# Altium PCB WhetherTime.PcbDoc
Units mil, origin at the board's own origin, x right, y up, seen from the top; angles counter-clockwise.
Board outline 1120 x 1125 mil, 4 copper layers (Top Layer, GND02, PWR03, Bottom Layer), stack 23.756 mil thick; 22 components, 11 nets, 78 pads, 18 vias.
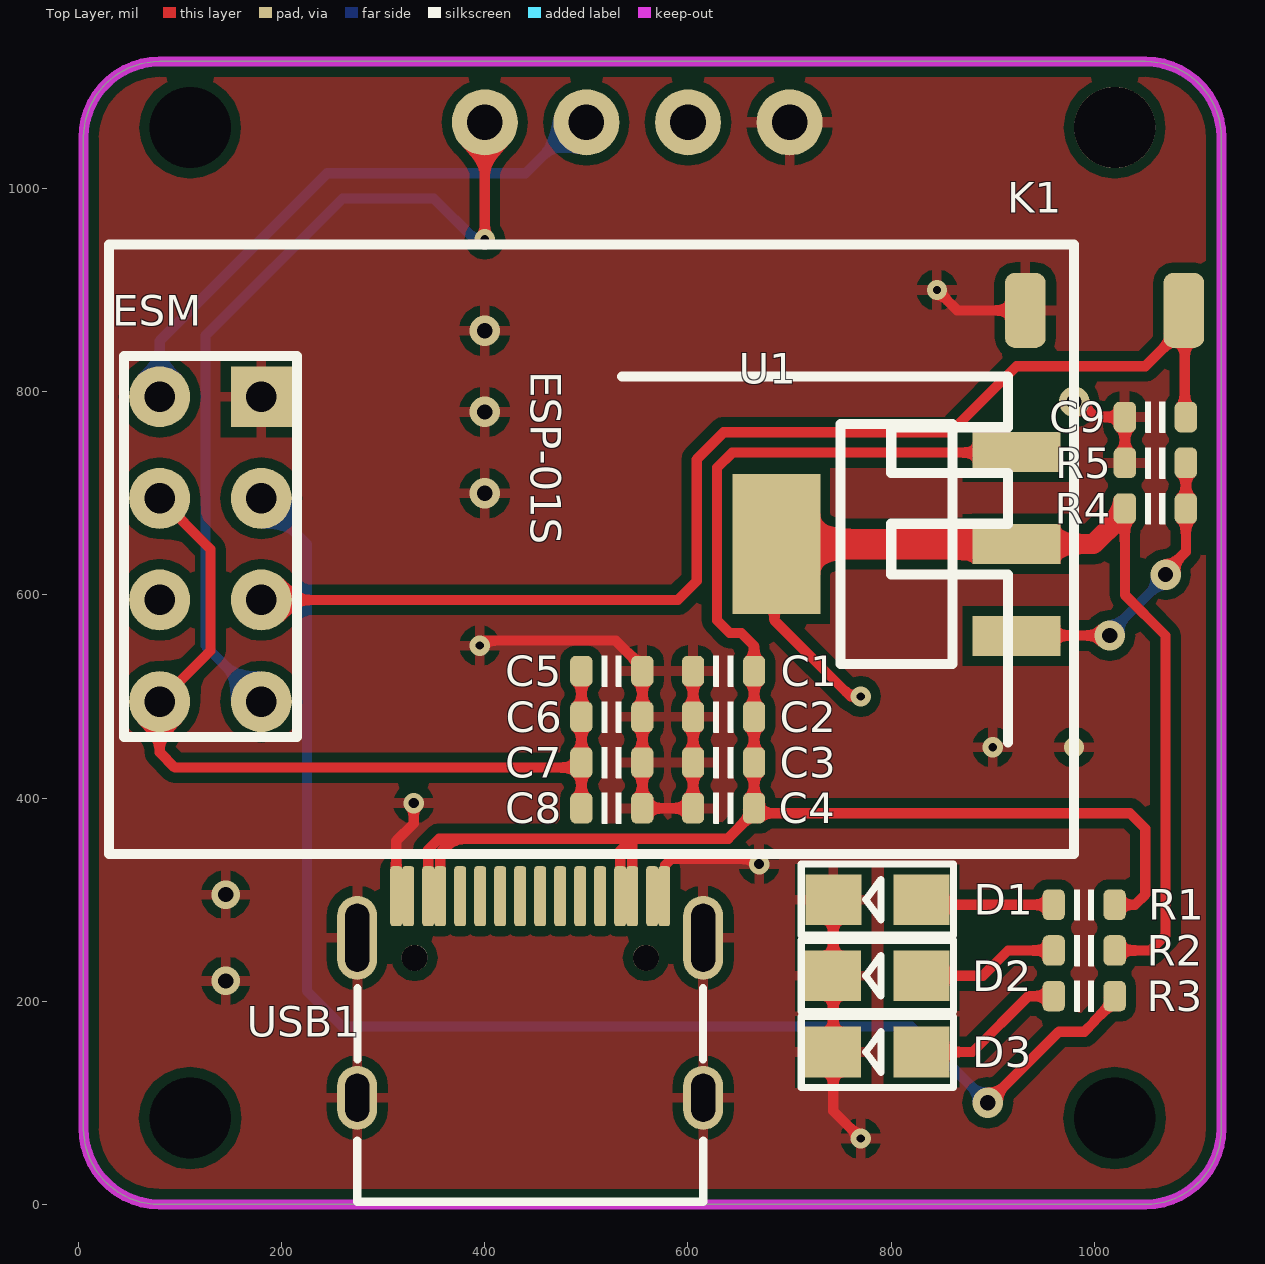
[diagram p0: Top Layer view]
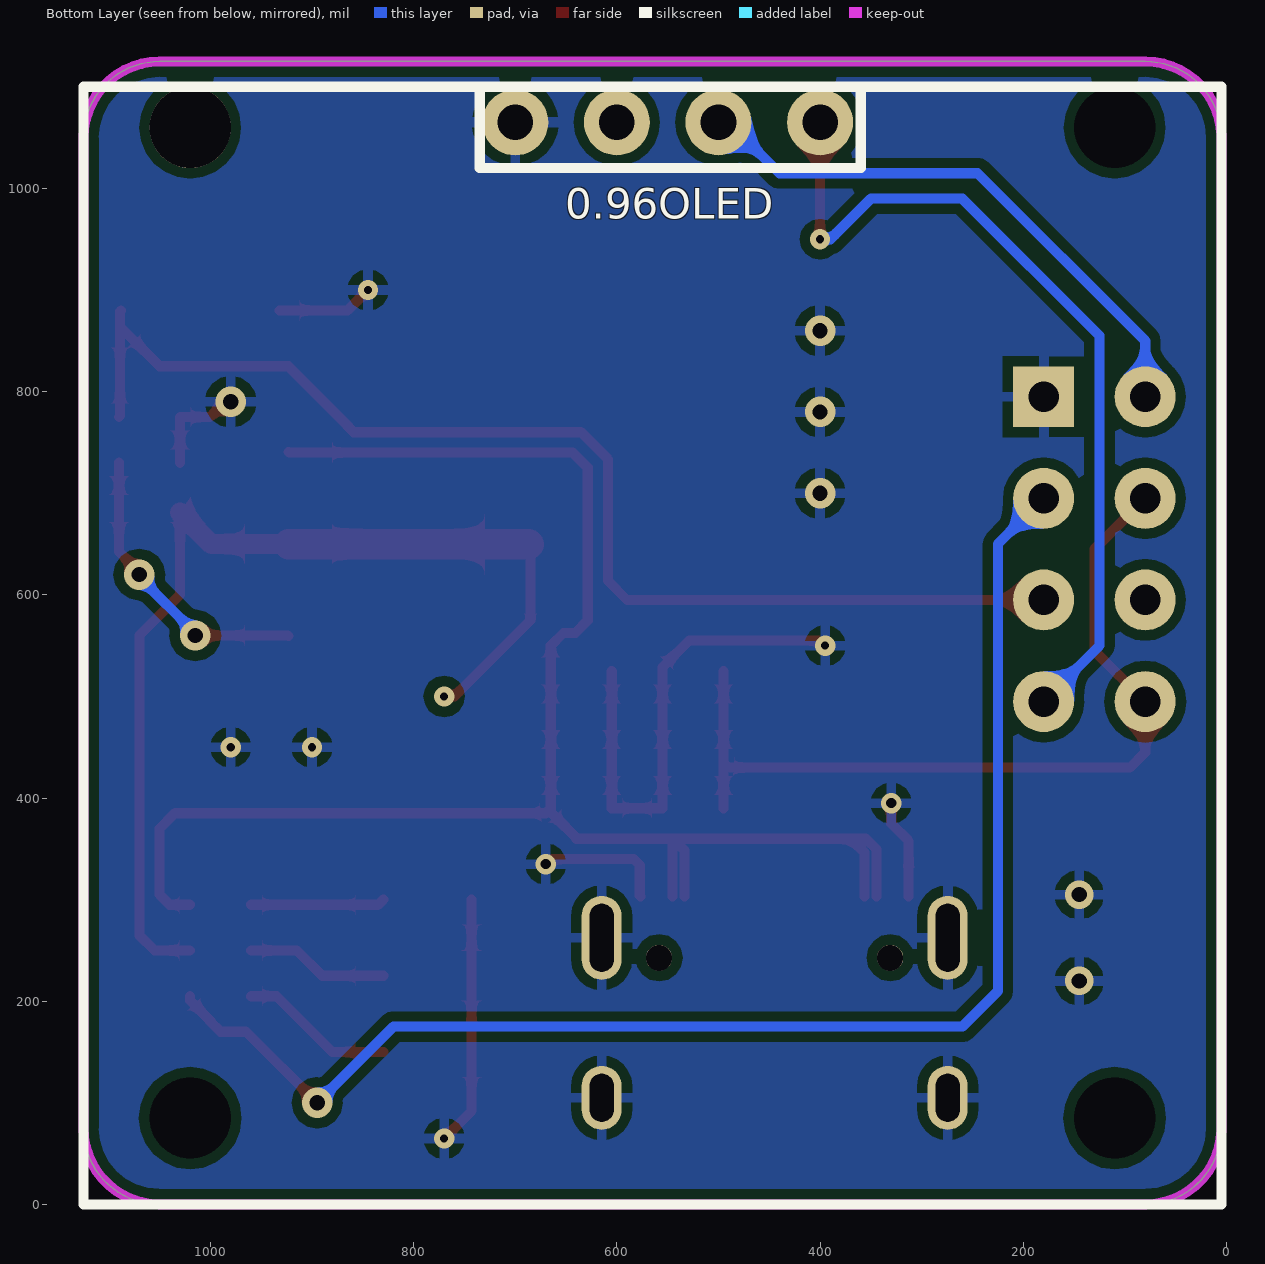
[diagram p1: Bottom Layer view, seen from below]
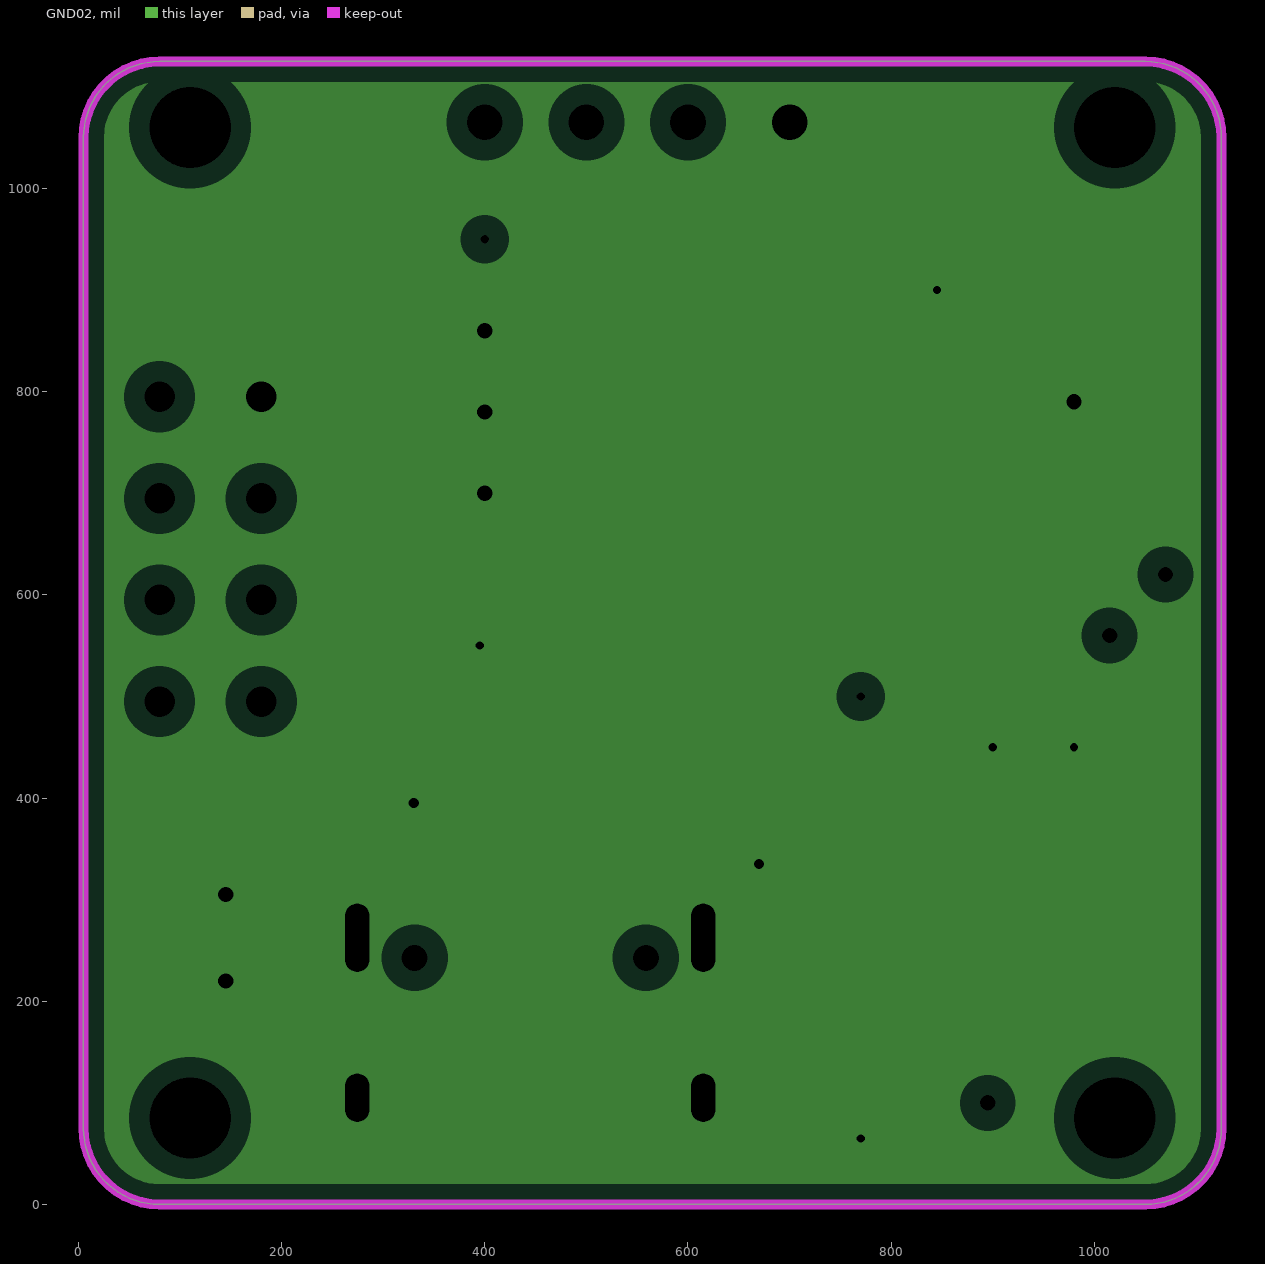
[diagram p2: GND02, clearances drawn from the general rule]
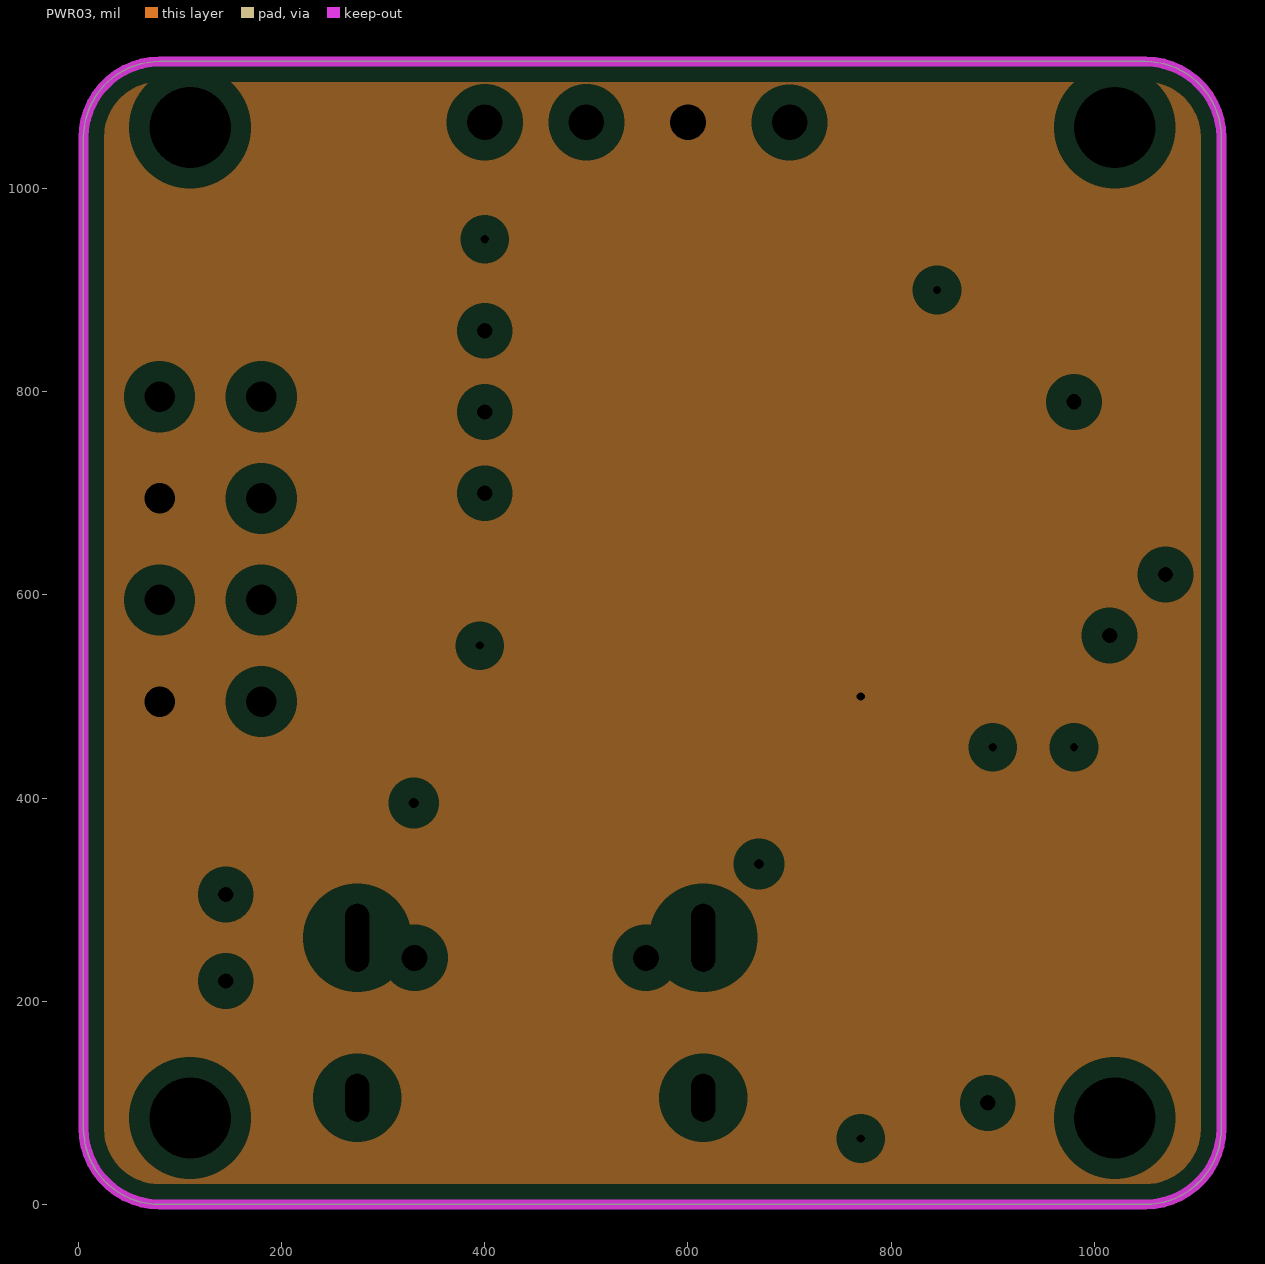
[diagram p3: PWR03, clearances drawn from the general rule]
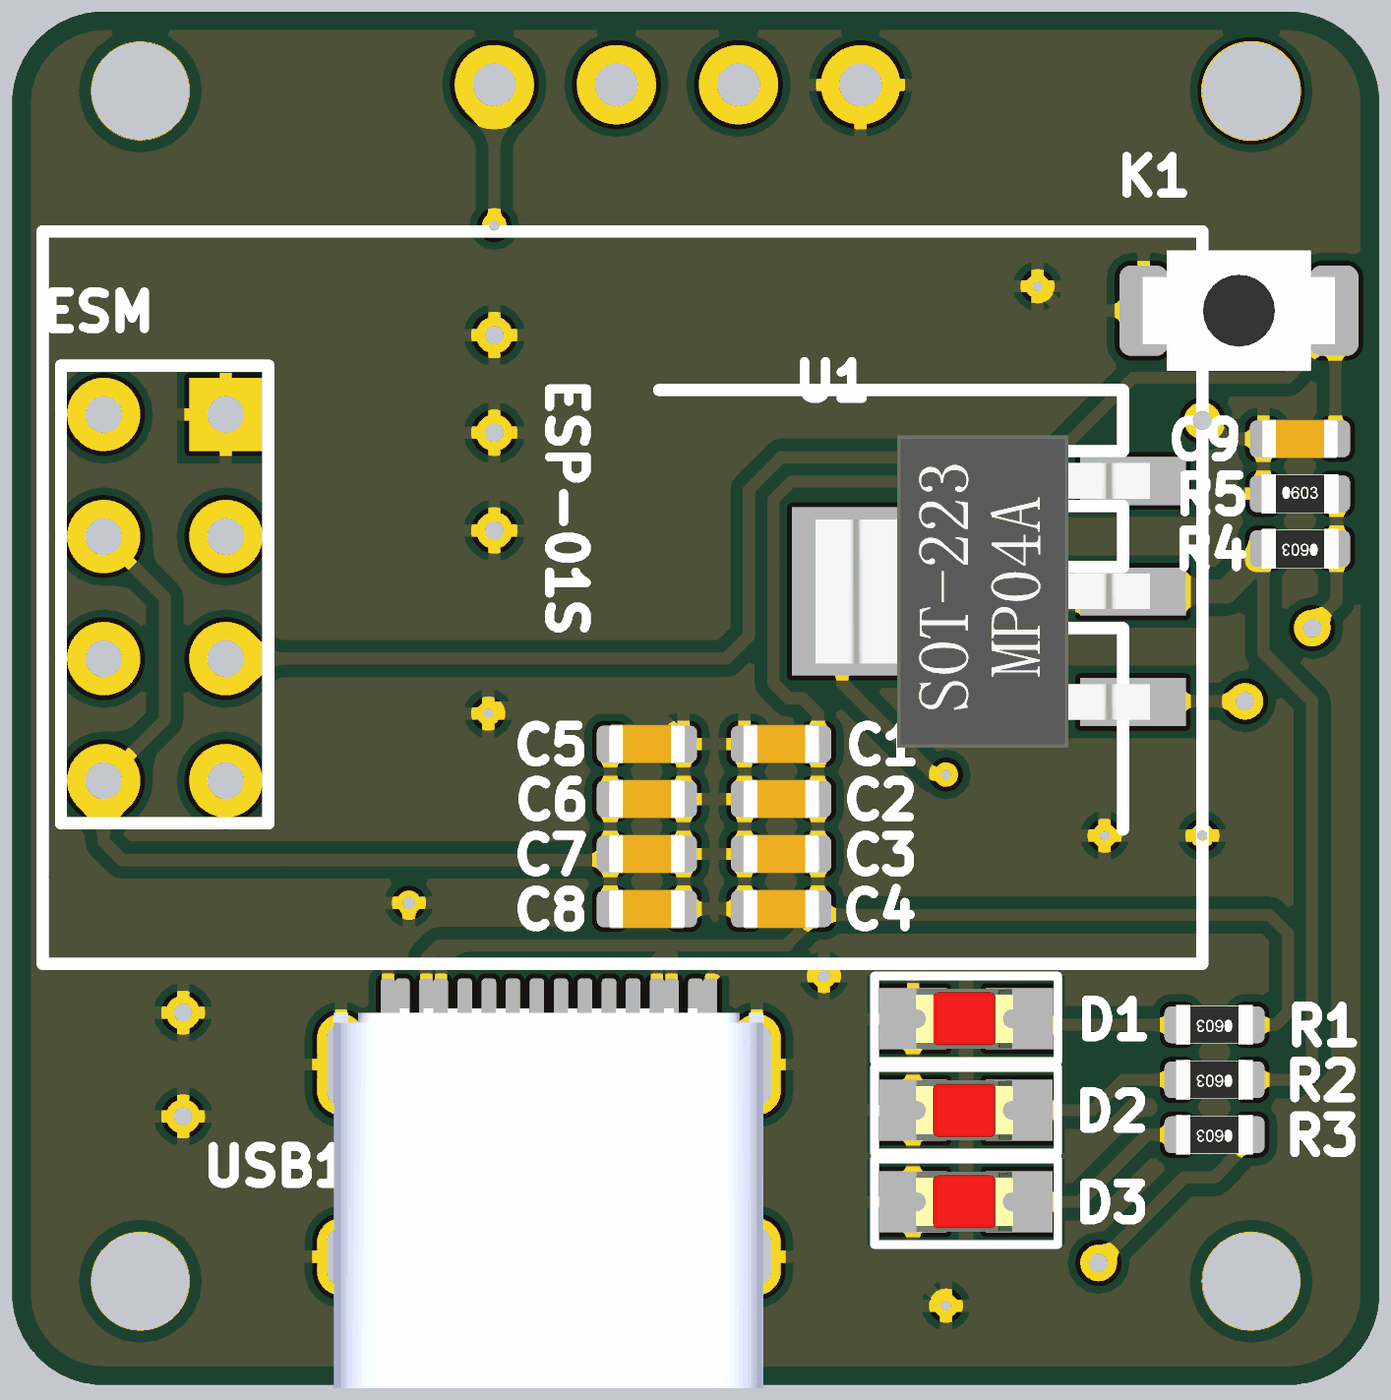
[diagram p4: 3D render of the assembled board from above, using the file's embedded part models]

## Layer stack, top to bottom
Top Solder: solder mask 0.4, Solder Resist, Dk 3.5
Top Layer: signal copper 1.4
Dielectric 2: prepreg 2.8, PP-006, Dk 4.1
GND02: plane copper 1.378, net GND
Dielectric 1: dielectric 12.6, FR-4, Dk 4.8
PWR03: plane copper 1.378, net 3V3
Dielectric 3: prepreg 2.8, PP-006, Dk 4.1
Bottom Layer: signal copper 1.4
Bottom Solder: solder mask 0.4, Solder Resist, Dk 3.5

## Board outline
5,75 5,1050 cw(c80,1050) 80,1125 1050,1125 cw(c1050,1050) 1125,1050 1125,75 cw(c1050,75) 1050,0 80,0 cw(c80,75)

## Design rules (kind name [scope] priority, off if disabled: settings)
Clearance [All] p1: gap=10 ignorepadtopadclearanceinfootprint=FALSE except(0: Arc-Hole Track-Hole SMDPad-Hole THPad-Hole Via-Hole Fill-Hole Poly-Hole Region-Hole Text-Hole)
PlaneClearance [All] p1: clearance=20
PlaneConnect [All] p1: planeconnectstyle=Relief reliefexpansion=20 reliefentries=4 reliefconductorwidth=10 reliefairgap=10
PolygonConnect [All] p1: connectstyle=Relief reliefconductorwidth=10 reliefentries=4 polygonreliefangle="90 Angle" airgapwidth=10
RoutingVias [All] p1: holewidth=28 width=50 viastyle="Through Hole" minholewidth=28 minwidth=50 maxholewidth=28 maxwidth=50
SolderMaskExpansion [All] p1: expansion=4 istentingtop=FALSE
Width [All] p1: maxlimit=10 minlimit=10 preferedwidth=10
28 further rules are at their usual default settings.

## Components (designator, comment, footprint, x,y, rotation, side; value= is the part's Value field where it differs from the comment)
0.96OLED "0.96OLED" 0.96OLED_4P 549.99,1065.04 r0 bottom (schematic designator *2)
C1 "10uF" 0603-CAP 635,525 r0 top value=0.1u
C2 "10uF" 0603-CAP 635,480 r0 top value=0.1u
C3 "22uF" 0603-CAP 635,435 r0 top value=0.1u
C4 "22uF" 0603-CAP 635,390 r0 top value=0.1u
C5 "100uF" 0603-CAP 525,525 r180 top value=0.1u
C6 "100uF" 0603-CAP 525,480 r0 top value=0.1u
C7 "22uF" 0603-CAP 525,435 r180 top value=0.1u
C8 "22uF" 0603-CAP 525,390 r180 top value=0.1u
C9 "10uF" 0603-CAP 1060,775 r0 top value=0.1u
D1 "color?" SMDLED 785.03,299.94 r180 top
D2 "color?" SMDLED 785,225 r180 top
D3 "color?" SMDLED 785,150 r180 top
ESM "ESP8266-01S" ESP8266-01S 530,640 r270 top (schematic designator *1)
K1 "TACT 2P" ButtonTACT_3x4x2_180 1010,880 r180 top value=3x4
R1 "10K" 0603-RES 990,295 r180 top value=22R
R2 "10K" 0603-RES 990,250 r180 top value=22R
R3 "10K" 0603-RES 990,205 r180 top value=22R
R4 "10K" 0603-RES 1060,685 r180 top value=22R
R5 "10K" 0603-RES 1060,730 r0 top value=22R
U1 "1117-ADJ" SOT223_JX 805,650 r0 top
USB1 "Type-C" Type-C-TOP 444.72,204.21 r270 top

## Footprints (in the part's own frame and the unit in brackets; to place one, negate y for a bottom-side part, rotate by r counter-clockwise, add the part's x,y. Pads: shape width x height; smd on the part's side, far side on the other; paste and mask are expansions set on the pad)
0.96OLED_4P [mm]
  round 1.65 hole 0.89: 1(3.81,0.001) 2(1.27,-0.002) 3(-1.27,-0.002) 4(-3.81,-0.002)
  silkscreen extent -13.84,-0.89 14.61,27.05, body extent -13.72,-0.76 14.48,26.92
0603-CAP [mil]
  rrect50% 22x30 smd: 1(-30,0) 2(30,0)
  silkscreen extent -10,-15 10,15, body extent -31,-16 32,16, height 31
0603-RES [mil]
  rrect50% 22x30 smd: 1(-30,0) 2(30,0)
  silkscreen extent -10,-15 10,15, body extent -31,-16 32,16, height 18
ButtonTACT_3x4x2_180 [mil]
  rrect50% 40x74 smd: 1(-78,0) 2(78,0)
  body extent -79,-49 79,49, height 63
ESP8266-01S [mil]
  rect 60x60 hole 30: 1(-155,-350)
  round 60 hole 30: 2(-55,-350) 3(45,-350) 4(145,-350) 5(145,-450) 6(45,-450) 7(-55,-450) 8(-155,-450)
  silkscreen extent -305,-500 295,450, body extent -305,-500 295,450, height 5
SMDLED [mm]
  rect 1.4x1.27 smd: 1(-1.142,-0.002) 2(1.068,-0.002)
  silkscreen extent -1.94,-0.89 1.87,0.89, body extent -1.01,-0.62 1.01,0.63, height 1.1
SOT223_JX [mm]
  rect 2.2x1 smd: 1(3,-2.3) 2(3,0) 3(3,2.3)
  rect 2.2x3.5 smd: 2(-3,0)
  silkscreen extent -1.4,-3 1.4,3, body extent -3.61,-3.25 3.35,3.25, height 1.7
Type-C-TOP [mm]
  round 0.65 hole 0.65: 0(-0.98,2.89) 0(-0.98,-2.89)
  oval 1.6x1 hole 0.6 slot 1.2 at 0 deg: 1(2.52,4.325) 2(2.52,-4.325)
  oval 2.1x1 hole 0.6 slot 1.7 at 0 deg: 3(-1.48,-4.325) 4(-1.48,4.325)
  rrect50% 1.5x0.3 smd: A1(-2.52,-3.35) A4(-2.52,-2.55) A5(-2.52,-1.25) A6(-2.52,-0.25) A7(-2.52,0.25) A8(-2.52,1.25) A9(-2.52,2.55) A12(-2.52,3.35) B1(-2.52,3.05) B4(-2.52,2.25) B5(-2.52,1.75) B6(-2.52,0.75) B7(-2.52,-0.75) B8(-2.52,-1.75) B9(-2.52,-2.25) B12(-2.52,-3.05)
  silkscreen extent -0.22,-4.33 5.12,4.33, body extent -2.64,-4.48 5.26,4.46, height 3.28

## Part data
C1 C2 C3 C4 C5 C6 C7 C8 C9: library part 电容-0603, "Capacitor"
D1 D2 D3: library part LED_0603, "LED", Type=0402
K1: library part ButtonTACT_3x4x2_180, "Button", Type="TACT 2P"
R1 R2 R3 R4 R5: library part 电阻-0603, "Resistor"
U1: library part AMS1117-ADJ, "IC"
USB1: library part USB-Type-C-TOP

## Free pads (board coordinates)
  round 60 hole 80: 1(110,1060) 3(1020,85) 4(110,85)
  round 80 hole 80: 2(1020,1060)

## Via types
v1: diameter 20, hole 8, Top Layer to Bottom Layer, 7 vias
v2: diameter 30, hole 15, Top Layer to Bottom Layer, 7 vias
v3: diameter 20, hole 10, Top Layer to Bottom Layer, 2 vias
v4: diameter 28, hole 15, Top Layer to Bottom Layer, 2 vias

## Nets (pads, with @x,y where several pads share a name; then routed paths per layer and width w, separated by ;. In a path a pad name is that pad's centre, name@x,y a point inside that pad or via, vN(x,y) a via of type N, cw(c..) or ccw(c..) an arc to the next point about the centre after c; other vN are vias at no path point)
3V3: 0.96OLED.2 C5.2 C6.1 C7.2 C8.2 ESM.5 ESM.7 R2.1 R4.2 U1.2 | length 1890.3
  Top Layer w10: ESM.7 130,645 130,545 ESM.5 80,445 95,430 490,430 C7.2 ; C8.2 C7.2 ; C5.2 C6.1 C7.2 ; U1.2@686.89,650 685,648.11 685,575 760,500 v1(770,500) ; R2.1 1055,250 1070,265 1070,560 1030,600 1030,681 R4.2
  Top Layer w20: U1.2@923.11,649.99 998.99,649.99 R4.2@1030,681
  Top Layer w30: U1.2@686.89,650 U1.2@923.1,650
GND: 0.96OLED.1 C1.1 C2.1 C3.1 C4.1 C5.1 C6.2 C7.1 C8.1 C9.1 D1.2 D2.2 D3.2 ESM.1 K1.2 R5.1 USB1.1 USB1.2 USB1.3 USB1.4 USB1.A1 USB1.A12 USB1.B1 USB1.B12 | length 1159.2
  Top Layer w10: USB1.A1 312.83,357.83 330,375 v3(330,395) ; v1(395,550) 400,555 529,555 555,529 C5.1 C6.2 C7.1 C8.1 C4.1 C3.1 C2.1 C1.1 ; USB1.A12 577.52,304.33 577.52,334.14 583.38,340 665,340 v3(670,335) ; D2.2 D3.2 742.96,92.04 v1(770,65) ; D2.2 D1.2 ; v1@850,895 865,880 K1.2 ; v2(980,790) 985.41,790 1000.41,775 C9.1 R5.1
  other v1: 900,450 980,450 845,900
  other v2: 400,700 400,780 400,860
  other v4: 145,220 145,305
GPIO0: C9.2 ESM.3 K1.1 | length 1196.8
  Top Layer w10: ESM.3 590,595 608.58,613.58 608.58,733.4 635.18,760 858.94,760 864.8,765.86 864.8,766.43 923.37,825 1050,825 K1.1@1089,864 ; K1.1 1089,879 K1.1@1089,864 ; C9.2 1089,776 K1.1@1089,864
GPIO2: ESM.2 R3.1 | length 1390.6
  Top Layer w10: v2(895,100) 965,170 990,170 1000.17,180.17 1000.17,180.9 1020,200.73 R3.1
  Bottom Layer w10: ESM.2 225,650 225,210 260,175 820,175 v2(895,100)
NetD1_1: D1.1 R1.2 | length 132.1
  Top Layer w10: D1.1 835,295 R1.2
NetD2_1: D2.1 R2.2 | length 140.4
  Top Layer w10: D2.1 890.06,225.06 915,250 R2.2
NetD3_1: D3.1 R3.2 | length 152.8
  Top Layer w10: D3.1 880.06,150.06 935,205 R3.2
NetR4_1: R4.1 R5.2 U1.1 | length 293.2
  Top Layer w10: U1.1 923.67,560 v2(1015,560) ; v2(1070,620) 1070,622.43 1090,642.43 R4.1 R5.2
  Bottom Layer w10: v2(1015,560) 1015,562.5 1070,617.5 v2(1070,620)
SCL: 0.96OLED.3 ESM.8 | length 564.1
  Bottom Layer w10: ESM.8 80,850 245,1015 440,1015 490.1,1065.1 0.96OLED.3
SDA: 0.96OLED.4 ESM.4 | length 845.4
  Top Layer w10: v1(400,950) 0.96OLED.4
  Bottom Layer w10: ESM.4 125,550 125,855 260,990 350,990 390,950 v1(400,950)
VDD_USB_5V: C1.2 C2.2 C3.2 C4.2 R1.1 U1.3 USB1.A4 USB1.A9 USB1.B4 USB1.B9 | length 1717
  Top Layer w10: USB1.A4 344.33,349.33 355,360 370,360 ; USB1.B9 356.14,346.14 370,360 ; USB1.B4 533.31,348.31 545,360 ; USB1.A9 545.12,360 ; U1.3 922.57,740 643.47,740 628.58,725.11 628.58,574.89 641.02,562.44 652.56,562.44 665,550 C2.2 C3.2 C4.2 ; R1.1 1040,295 1050,305 1050,370 1035,385 670,385 C4.2 ; 370,360 545,360 ; 545,360 545.12,360 ; 545.12,360 640,360 640,361 665,386 C4.2
pads on no net: ESM.6 USB1.0 USB1.A5 USB1.A6 USB1.A7 USB1.A8 USB1.B5 USB1.B6 USB1.B7 USB1.B8

## Polygon pours and split planes (outlines as drawn)
no net on Keep-Out Layer "NONET_L-01_P-001" (none): 80,0 cw(c80,75) 5,75 5,1050 cw(c80,1050) 80,1125 1050,1125 cw(c1050,1050) 1125,1050 1125,75 cw(c1050,75) 1050,0
no net on Keep-Out Layer "NONET_L-01_P-001" (none): 80,0 cw(c80,75) 5,75 5,1050 cw(c80,1050) 80,1125 1050,1125 cw(c1050,1050) 1125,1050 1125,75 cw(c1050,75) 1050,0
GND on Top Layer "GND_L01_P000" (solid, pour order 0): 80,0 cw(c80,75) 5,75 5,1050 cw(c80,1050) 80,1125 1050,1125 cw(c1050,1050) 1125,1050 1125,75 cw(c1050,75) 1050,0
GND on Bottom Layer "GND_L04_P001" (solid, pour order 1): 80,0 cw(c80,75) 5,75 5,1050 cw(c80,1050) 80,1125 1050,1125 cw(c1050,1050) 1125,1050 1125,75 cw(c1050,75) 1050,0
GND on GND02 (split plane): 1056.16,1104.64 1062.24,1103.61 1068.16,1101.9 1073.86,1099.54 1079.25,1096.56 1084.28,1092.99 1088.88,1088.88 1092.99,1084.28 1096.56,1079.25 1099.54,1073.86 1101.9,1068.16 1103.61,1062.24 1104.64,1056.16 1104.96,1050.54 1104.9,1050 1104.9,75 1104.96,74.46 1104.64,68.84 1103.61,62.76 1101.9,56.84 1099.54,51.14 1096.56,45.75 1092.99,40.72 1088.88,36.12 1084.28,32.01 1079.25,28.44 1073.86,25.46 1068.16,23.1 1062.24,21.39 1056.16,20.36 1050.54,20.04 1050,20.1 80,20.1 79.46,20.04 73.84,20.36 67.76,21.39 61.84,23.1 56.14,25.46 50.75,28.44 45.72,32.01 41.12,36.12 37.01,40.72 33.44,45.75 30.46,51.14 28.1,56.84 26.39,62.76 25.36,68.84 25.04,74.46 25.1,75 25.1,1050 25.04,1050.54 25.36,1056.16 26.39,1062.24 28.1,1068.16 30.46,1073.86 33.44,1079.25 37.01,1084.28 41.12,1088.88 45.72,1092.99 50.75,1096.56 56.14,1099.54 61.84,1101.9 67.76,1103.61 73.84,1104.64 79.46,1104.96 80,1104.9 1050,1104.9 1050.54,1104.96
3V3 on PWR03 (split plane): 1056.16,1104.64 1062.24,1103.61 1068.16,1101.9 1073.86,1099.54 1079.25,1096.56 1084.28,1092.99 1088.88,1088.88 1092.99,1084.28 1096.56,1079.25 1099.54,1073.86 1101.9,1068.16 1103.61,1062.24 1104.64,1056.16 1104.96,1050.54 1104.9,1050 1104.9,75 1104.96,74.46 1104.64,68.84 1103.61,62.76 1101.9,56.84 1099.54,51.14 1096.56,45.75 1092.99,40.72 1088.88,36.12 1084.28,32.01 1079.25,28.44 1073.86,25.46 1068.16,23.1 1062.24,21.39 1056.16,20.36 1050.54,20.04 1050,20.1 80,20.1 79.46,20.04 73.84,20.36 67.76,21.39 61.84,23.1 56.14,25.46 50.75,28.44 45.72,32.01 41.12,36.12 37.01,40.72 33.44,45.75 30.46,51.14 28.1,56.84 26.39,62.76 25.36,68.84 25.04,74.46 25.1,75 25.1,1050 25.04,1050.54 25.36,1056.16 26.39,1062.24 28.1,1068.16 30.46,1073.86 33.44,1079.25 37.01,1084.28 41.12,1088.88 45.72,1092.99 50.75,1096.56 56.14,1099.54 61.84,1101.9 67.76,1103.61 73.84,1104.64 79.46,1104.96 80,1104.9 1050,1104.9 1050.54,1104.96

## Keep-outs
Keep-Out Layer:
  the board outline again, w10

## Text inside footprints (layer, text, board x,y; h text height)
ESM: Top Overlay "ESP-01S" at 445,820 h30 r270